# Altium PCB Toshiba_CB_PCB1.PcbDoc
Units mm, origin at the board's own origin, x right, y up, seen from the top; angles counter-clockwise.
Board outline 110 x 115 mm, 2 copper layers (Top Layer, Bottom Layer); 65 components, 53 nets, 193 pads, 41 vias.
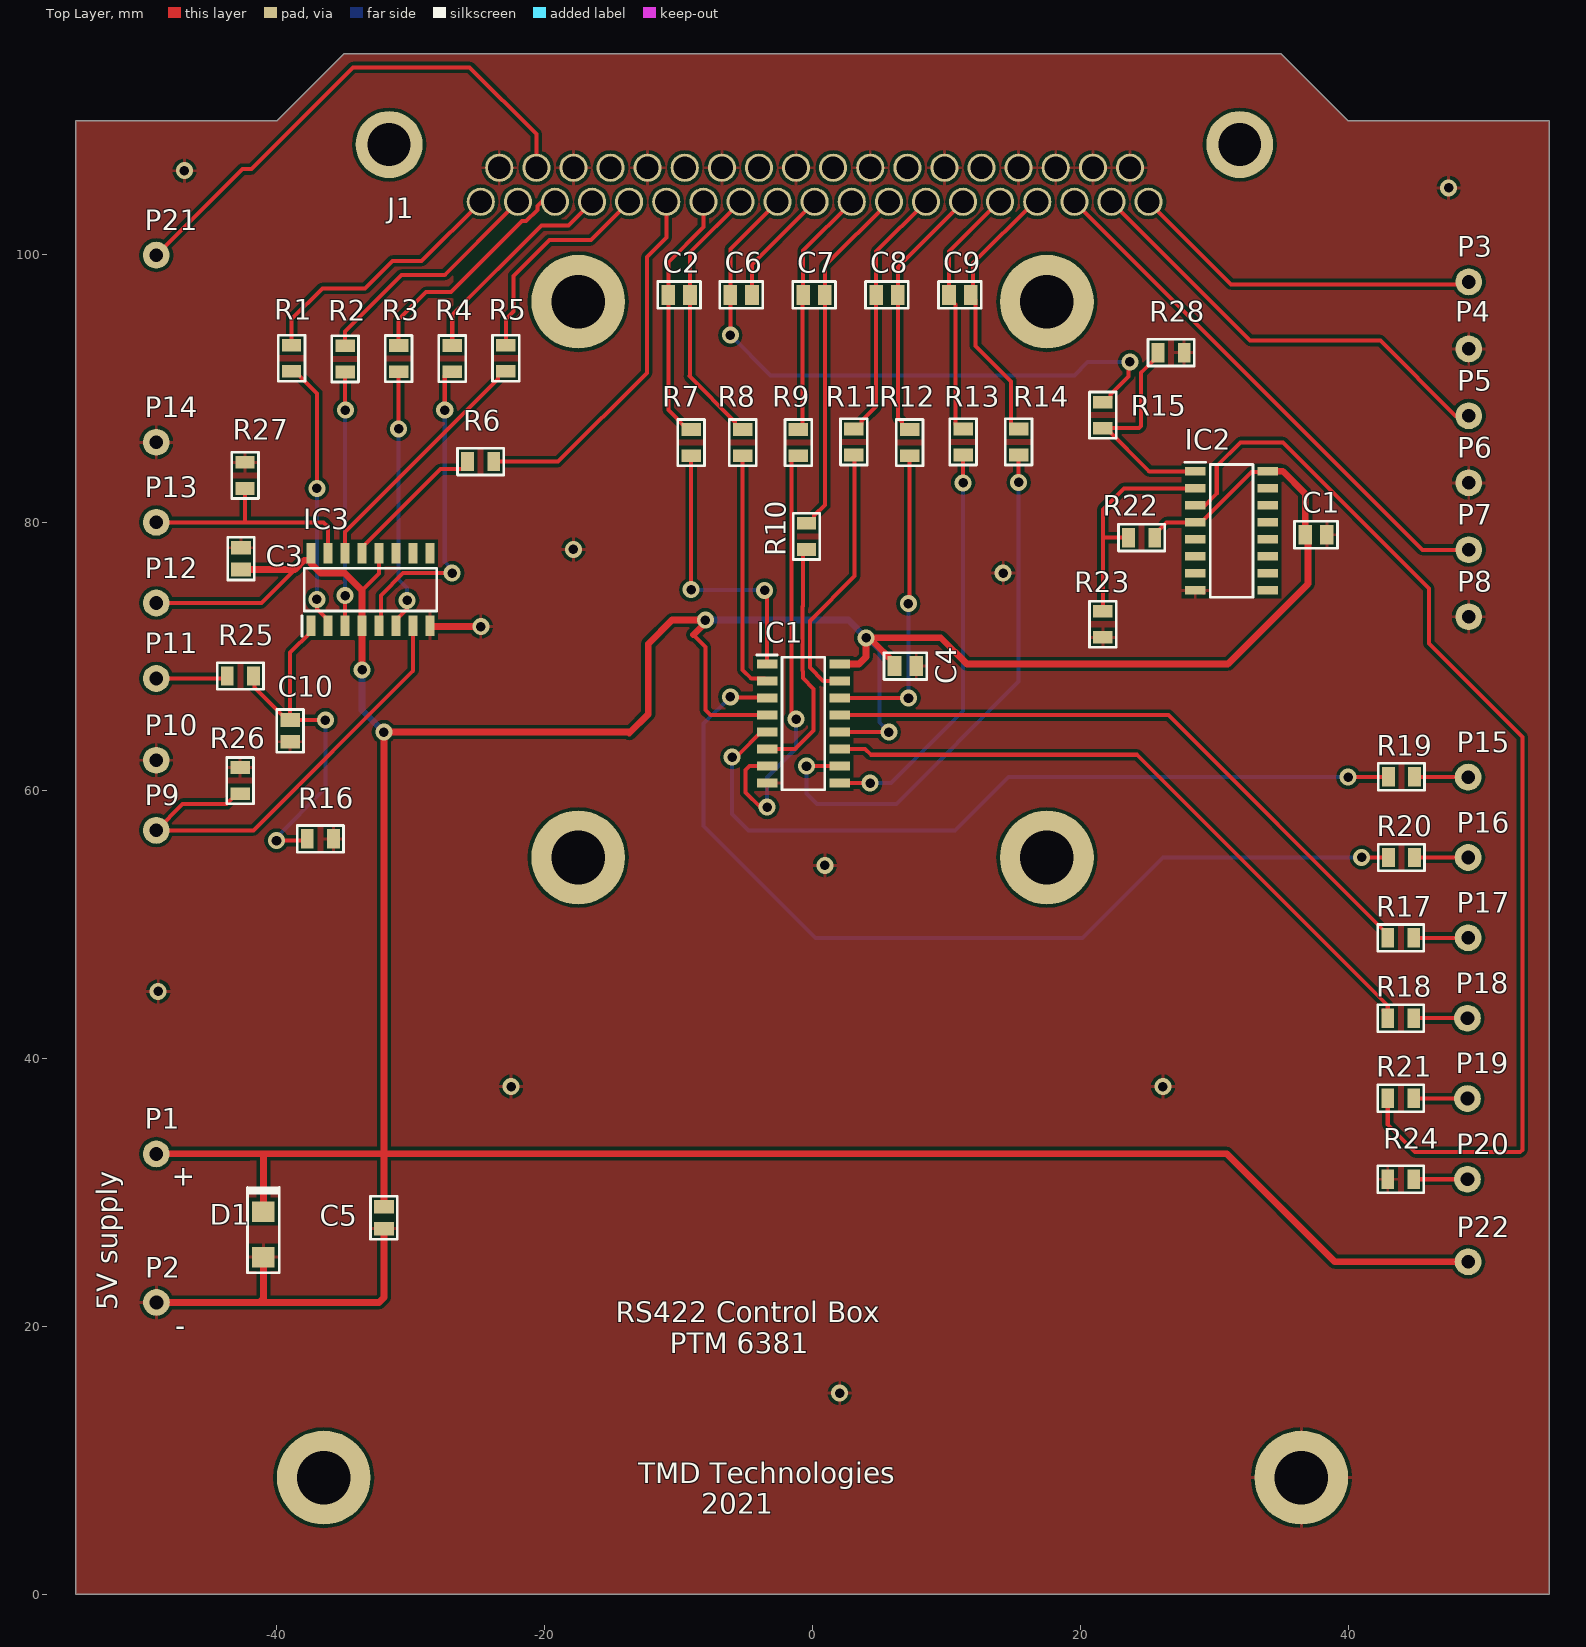
[diagram p0: Top Layer view]
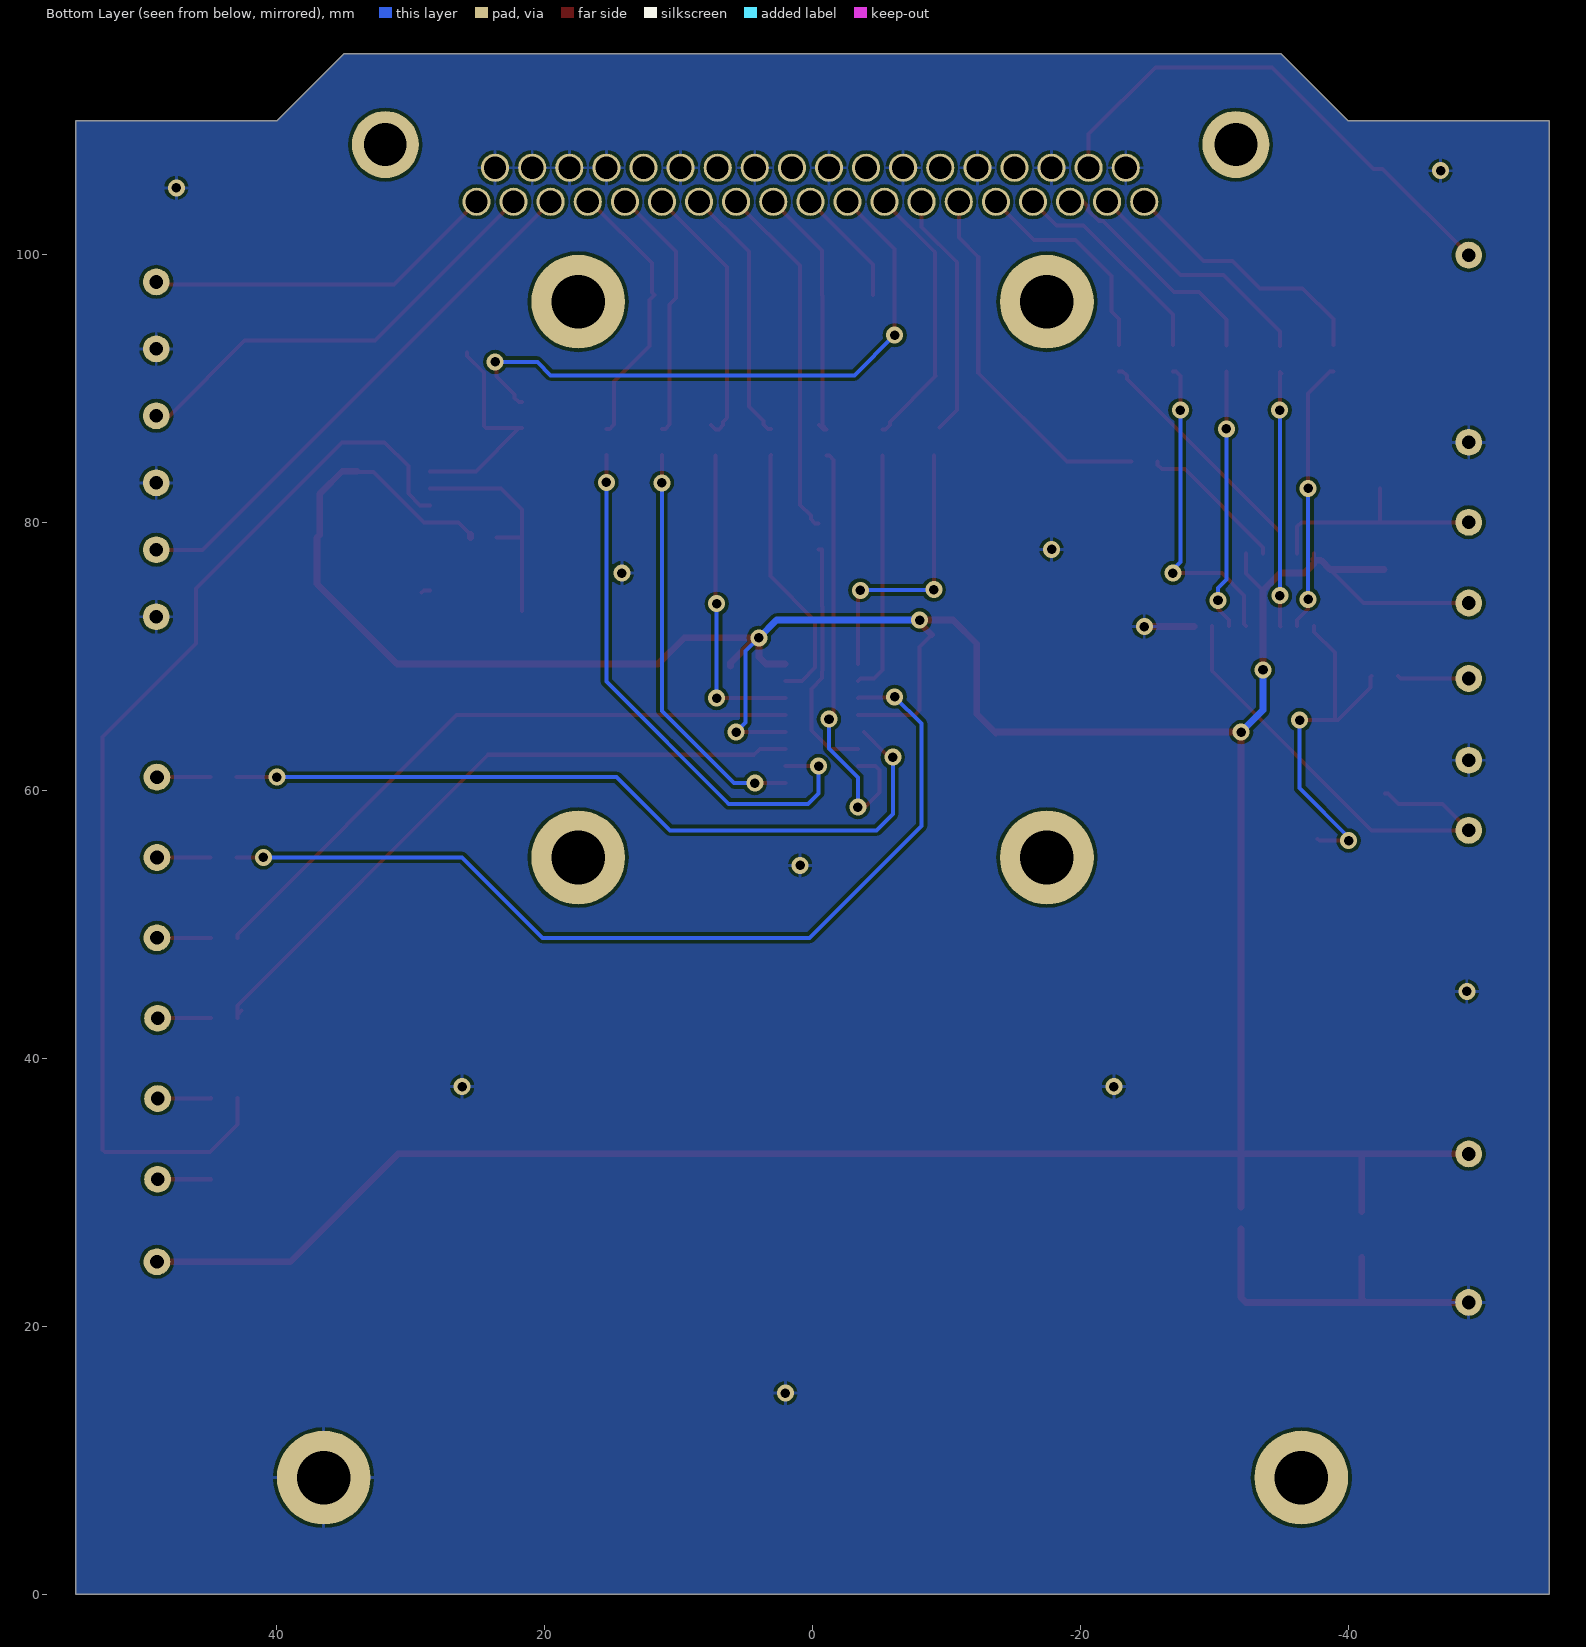
[diagram p1: Bottom Layer view, seen from below]

## Layer stack, top to bottom
Top Solder: solder mask 0.0102, Solder Resist, Dk 3.5
Top Layer: signal copper 0.0356
Dielectric 1: dielectric 0.32, FR-4, Dk 4.8
Bottom Layer: signal copper 0.0356
Bottom Solder: solder mask 0.0102, Solder Resist, Dk 3.5

## Board outline
-35,115 -40,110 -55,110 -55,0 55,0 55,110 40,110 35,115

## Design rules (kind name [scope] priority, off if disabled: settings)
Clearance [All] p1: gap=0.254 ignorepadtopadclearanceinfootprint=FALSE except(0: Arc-Hole Track-Hole SMDPad-Hole THPad-Hole Via-Hole Fill-Hole Poly-Hole Region-Hole Text-Hole)
PolygonConnect [All] p1: connectstyle=Relief reliefconductorwidth=0.254 reliefentries=4 polygonreliefangle="90 Angle" airgapwidth=0.254
RoutingVias [All] p1: holewidth=0.711 width=1.27 viastyle="Through Hole" minholewidth=0.711 minwidth=1.27 maxholewidth=0.711 maxwidth=1.27
SilkToSolderMaskClearance [IsPad] p1: minsilkscreentomaskgap=0.2 clearancetoexposedcopper=TRUE
SolderMaskExpansion [All] p1: expansion=0.102
Width [All] p1: maxlimit=0.5 minlimit=0.254 preferedwidth=0.3
29 further rules are at their usual default settings.

## Components (designator, comment, footprint, x,y, rotation, side; value= is the part's Value field where it differs from the comment)
C1 "Cap1" CAPC2012X94N 37.592,79.096 r0 top value=100nF
C2 "Cap1" CAPC2012X94N -9.96,97 r180 top value=2.2nF
C3 "Cap1" CAPC2012X94N -42.672,77.318 r90 top value=100nF
C4 "Cap1" CAPC2012X94N 6.934,69.291 r0 top value=100nF
C5 "Cap1" CAPC2012X94N -32,28.1 r90 top value=220nF
C6 "Cap1" CAPC2012X94N -5.327,97 r180 top value=2.2nF
C7 "Cap1" CAPC2012X94N 0.115,97 r180 top value=2.2nF
C8 "Cap1" CAPC2012X94N 5.557,97 r180 top value=2.2nF
C9 "Cap1" CAPC2012X94N 11,97 r180 top value=2.2nF
C10 "Cap1" CAPC2012X94N -39,64.452 r90 top value=100nF
D1 "D Zener" Diode -41,28.561 r90 top
IC1 "DS34C86TM_NOPB" SOIC127P600X175-16N -0.68,65 r0 top
IC2 "DS34C86TM_NOPB" SOIC127P600X175-16N 31.288,79.39 r0 top
IC3 "DS34C87TM_NOPB" SOIC127P600X175-16N -33,75 r90 top
J1 "D connector 37 way" "D connector 37 way" 0.145,106.095 r270 top locked
P1 "Pin1" pin1 -49,32.89 r0 top
P2 "Pin1" pin1 -48.987,21.8 r0 top
P3 "Pin1" pin1 49,98 r0 top
P4 "Pin1" pin1 49,93 r0 top
P5 "Pin1" pin1 49,88 r0 top
P6 "Pin1" pin1 49,83 r0 top
P7 "Pin1" pin1 49,78 r0 top
P8 "Pin1" pin1 49,73 r0 top
P9 "Pin1" pin1 -49,57 r180 top
P10 "Pin1" pin1 -49,62.288 r0 top
P11 "Pin1" pin1 -49,68.34 r180 top
P12 "Pin1" pin1 -49,74.025 r0 top
P13 "Pin1" pin1 -49,80 r180 top
P14 "Pin1" pin1 -49,86.025 r0 top
P15 "Pin1" pin1 48.95,61.025 r0 top
P16 "Pin1" pin1 48.95,55.025 r0 top
P17 "Pin1" pin1 48.95,49.025 r0 top
P18 "Pin1" pin1 48.9,43.025 r0 top
P19 "Pin1" pin1 48.9,37.025 r0 top
P20 "Pin1" pin1 48.9,31 r0 top
P21 "Pin1" pin1 -49,100 r0 top
P22 "Pin1" pin1 48.95,24.835 r0 top
R1 "Res1" "Res1 0805" -38.9,93.25 r270 top value=47R
R2 "Res1" "Res1 0805" -34.9,93.2 r270 top value=47R
R3 "Res1" "Res1 0805" -30.9,93.225 r270 top value=47R
R4 "Res1" "Res1 0805" -26.9,93.225 r270 top value=47R
R5 "Res1" "Res1 0805" -22.9,93.25 r270 top value=47R
R6 "Res1" "Res1 0805" -23.81,84.565 r180 top value=47R
R7 "Res1" "Res1 0805" -9.06,86.95 r270 top value=1k8
R8 "Res1" "Res1 0805" -5.21,86.95 r270 top value=1k8
R9 "Res1" "Res1 0805" -1.06,86.95 r270 top value=1k8
R10 "Res1" "Res1 0805" -0.45,79.95 r270 top value=1k8
R11 "Res1" "Res1 0805" 3.09,87 r270 top value=1k8
R12 "Res1" "Res1 0805" 7.25,86.95 r270 top value=1k8
R13 "Res1" "Res1 0805" 11.24,87 r270 top value=1k8
R14 "Res1" "Res1 0805" 15.39,87 r270 top value=1k8
R15 "Res1" "Res1 0805" 21.678,89 r270 top value=1k8
R16 "Res1" "Res1 0805" -35.766,56.393 r180 top value=20k
R17 "Res1" "Res1 0805" 42.95,49 r0 top value=1k8
R18 "Res1" "Res1 0805" 42.95,43 r0 top value=1k8
R19 "Res1" "Res1 0805" 43,61.025 r0 top value=1k8
R20 "Res1" "Res1 0805" 43,55 r0 top value=1k8
R21 "Res1" "Res1 0805" 42.95,37.025 r0 top value=1k8
R22 "Res1" "Res1 0805" 23.593,78.88 r0 top value=1k8
R23 "Res1" "Res1 0805" 21.678,73.39 r270 top value=1k8
R24 "Res1" "Res1 0805" 44.9,30.975 r180 top value=1k8
R25 "Res1" "Res1 0805" -41.748,68.552 r180 top value=1k8
R26 "Res1" "Res1 0805" -42.735,59.765 r90 top value=1k8
R27 "Res1" "Res1 0805" -42.373,82.554 r90 top value=1k8
R28 "Res1" "Res1 0805" 27.75,92.7 r180 top value=20k

## Footprints (in the part's own frame and the unit in brackets; to place one, negate y for a bottom-side part, rotate by r counter-clockwise, add the part's x,y. Pads: shape width x height; smd on the part's side, far side on the other; paste and mask are expansions set on the pad)
CAPC2012X94N [mm]
  rect 1.02x1.47 smd: 1(-0.81,0) 2(0.81,0)
  silkscreen extent -1.6,-1 1.6,1, body extent -1,-0.63 1,0.63, height 0.94
"D connector 37 way" [mm]
  round 2.1 hole 1.65: 1(2.135,-24.915) 2(2.135,-22.145) 3(2.135,-19.375) 4(2.135,-16.605) 5(2.135,-13.835) 6(2.135,-11.065) 7(2.135,-8.295) 8(2.135,-5.525) 9(2.135,-2.755) 10(2.135,0.015) 11(2.135,2.785) 12(2.135,5.555) 13(2.135,8.325) 14(2.135,11.095) 15(2.135,13.865) 16(2.135,16.635) 17(2.135,19.405) 18(2.135,22.175) 19(2.135,24.945) 20(-0.405,-23.535) 21(-0.405,-20.765) 22(-0.405,-17.995) 23(-0.405,-15.225) 24(-0.405,-12.455) 25(-0.405,-9.685) 26(-0.405,-6.915) 27(-0.405,-4.145) 28(-0.405,-1.375) 29(-0.405,1.395) 30(-0.405,4.165) 31(-0.405,6.935) 32(-0.405,9.705) 33(-0.405,12.475) 34(-0.405,15.245) 35(-0.405,18.015) 36(-0.405,20.785) 37(-0.405,23.555)
  round 5 hole 3.2: 38(-2.135,-31.755) 39(-2.135,31.755)
  body extent -14.13,-34.84 3.87,34.73, height 13
Diode [mm] "DO214AC"
  rect 1.52x1.68 smd: 1(-3.4,0) 2(0,0)
  silkscreen extent -4.57,-1.19 1.88,1.19, body extent -3.95,-1.4 0.55,1.4, height 13
pin1 [mm] "Pressed pin"
  round 2 hole 1.02: 1(0,-0.025)
"Res1 0805" [mm]
  rect 0.95x1.45 smd: 1(0,0) 2(1.95,0)
  silkscreen extent -0.75,-1 2.7,1, body extent -1.12,-1.53 1.95,0.63, height 13
SOIC127P600X175-16N [mm]
  rect 1.525x0.65 smd: 1(-2.712,4.445) 2(-2.712,3.175) 3(-2.712,1.905) 4(-2.712,0.635) 5(-2.712,-0.635) 6(-2.712,-1.905) 7(-2.712,-3.175) 8(-2.712,-4.445) 9(2.712,-4.445) 10(2.712,-3.175) 11(2.712,-1.905) 12(2.712,-0.635) 13(2.712,0.635) 14(2.712,1.905) 15(2.712,3.175) 16(2.712,4.445)
  silkscreen extent -3.47,-4.95 1.6,5.12, body extent -3,-4.95 3,4.95, height 1.75

## Part data
C1 C2 C3 C4 C5 C6 C7 C8 C9 C10: "Capacitor", Manufacturer_Name=AVX, Manufacturer_Part_Number=08055C104KAT2A, RS Part Number=4646688P, Allied_Number=70002096, Datasheet Link=http://uk.rs-online.com/web/p/products/4646688P, Height=0.94mm, RS Price/Stock=http://uk.rs-online.com/web/p/products/4646688P
D1: "Zener Diode", LatestRevisionDate=17-Jul-2002, LatestRevisionNote="Re-released for DXP Platform.", PackageReference=DIODE-0.7, Published=8-Jun-2000, Publisher="Altium Limited"
IC1 IC2: "Integrated Circuit", Manufacturer_Name="Texas Instruments", Manufacturer_Part_Number=DS34C86TM/NOPB, RS Part Number=0460607P, Datasheet Link=http://uk.rs-online.com/web/p/products/0460607P, Height=1.75mm, RS Price/Stock=http://uk.rs-online.com/web/p/products/0460607P
IC3: "Integrated Circuit", Manufacturer_Name="Texas Instruments", Manufacturer_Part_Number=DS34C87TM/NOPB, RS Part Number=0460651, Datasheet Link=http://uk.rs-online.com/web/p/products/0460651, Height=1.75mm, RS Price/Stock=http://uk.rs-online.com/web/p/products/0460651
J1: "Receptacle Assembly, 37 Position, Right Angle", PackageDocument=U, DatasheetDocument=19-Mar-1999, Gender=Receptacle, LatestRevisionDate=17-Jul-2002, LatestRevisionNote="Re-released for DXP Platform.", Orientation="Right Angle", PackageReference=787202, Positions=25, Published=15-Jun-2001, Publisher="Altium Limited"
R1 R2 R3 R4 R5 R6 R7 R8 R9 R10 R11 R12 R13 R14 R15 R16 R17 R18 R19 R20 R21 R22 R23 R24 R25 R26 R27 R28: "0805 resistor", LatestRevisionDate=29-May-2009, LatestRevisionNote="IPC-7351 Footprint Added.", PackageDescription="Chip Resistor", PackageReference=J1-0603, Published=8-Jun-2000, Publisher="Altium Limited"

## Free pads (board coordinates)
  round 7 hole 4: 8(-36.5,8.7) 8(-17.5,55) 8(-17.5,96.5) 8(17.5,55) 8(17.5,96.5) 8(36.5,8.7)

## Via types
v1: diameter 1.27, hole 0.711, Top Layer to Bottom Layer, 41 vias

## Nets (pads, with @x,y where several pads share a name; then routed paths per layer and width w, separated by ;. In a path a pad name is that pad's centre, name@x,y a point inside that pad or via, vN(x,y) a via of type N, cw(c..) or ccw(c..) an arc to the next point about the centre after c; other vN are vias at no path point)
5V: C1.1 C3.1 C4.1 C5.2 D1.2 IC1.4 IC1.12 IC1.16 IC2.4 IC2.16 IC3.4 IC3.12 IC3.16 P1.1 P12.1 P22.1 R22.2 | length 308.8
  Top Layer w0.3: P12.1 -41.157,74 -38.649,76.508 ; -37.445,76.945 -37.445,77.275 IC3.16 ; -33.635,74.93 -32.365,76.2 IC3.12 ; -8.897,71.629 -8,70.732 -8,66 -7.635,65.635 IC1.4 ; IC1.12 v1(5.7,64.365) ; R22.2@25.543,79.13 26.438,80.025 IC2.4 29.013,80.025 32.788,83.799 33.964,83.799 IC2.16
  Top Layer w0.5: P1.1 -48.987,32.878 -42.012,32.878 -42,32.89 -41,32.89 ; C3.1 -38.649,76.508 -37.958,77.2 -37.52,77.2 IC3.16@-37.445,77.275 ; D1.2 -41,32.89 ; -37.445,76.945 -36.734,76.234 -34.94,76.234 -33.635,74.93 IC3.4 v1(-33.635,69) ; C5.2 -32,32.89 ; -8.897,71.629 -8,72.527 v1(-8,72.725) -10.494,72.725 -12.259,70.961 -12.259,65.704 -13.69,64.273 -13.69,64.365 v1(-32,64.365) -32,32.89 ; IC1.16 3.473,69.445 4,69.972 v1(4,71.405) ; C4.1 6.124,69.516 4.383,71.257 4.147,71.257 v1(4,71.405) ; R22.2 R22.2@25.543,79.13 ; IC2.16 35.115,83.835 36.782,82.168 C1.1 36.999,78.879 36.999,75.431 31.013,69.445 11.53,69.445 9.57,71.405 v1(4,71.405) ; P22.1 39,24.81 30.92,32.89 -32,32.89 ; -41,32.89 -32,32.89
  Bottom Layer w0.3: v1@4.005,71.4 5,70.405 5,65.065 v1(5.7,64.365)
  Bottom Layer w0.5: v1(-33.635,69) -33.635,66 v1(-32,64.365) ; v1(-8,72.725) 2.679,72.725 v1(4,71.405)
"BEAM MONITOR": J1.18 P5.1 | length 33.3
  Top Layer w0.3: J1.18 32.68,93.6 42.4,93.6 48.025,87.975 P5.1
"CATHODE V MON": J1.17 P7.1 | length 40.2
  Top Layer w0.3: J1.17 45.535,77.975 P7.1
"FAULT A IN": IC1.9 R13.2 | length 30.6
  Top Layer w0.3: IC1.9 v1(4.31,60.555) ; v1(11.24,82.975) R13.2
  Bottom Layer w0.3: v1(4.31,60.555) 5.865,60.555 11.24,65.93 v1(11.24,82.975)
"FAULT B IN": IC1.10 R14.2 | length 41.4
  Top Layer w0.3: v1(-0.45,61.825) IC1.10 ; v1(15.39,83) R14.2
  Bottom Layer w0.3: v1(-0.45,61.825) -0.45,59.77 0.32,59 6.255,59 15.39,68.135 v1(15.39,83)
GND: C1.2 C3.2 C4.2 C5.1 C10.1 D1.1 IC1.8 IC2.8 IC3.8 J1.20 J1.22 J1.24 J1.26 J1.28 J1.30 J1.32 J1.34 J1.35 J1.36 J1.37 P2.1 P4.1 P6.1 P8.1 P10.1 P14.1 pad.8@36.5,8.7 R16.1 R23.2 R24.2 R26.2 R27.2 R28.1 | length 30.8
  Top Layer w0.3: IC3.8 IC3.8@-28.508,72.241 ; v1@-24.865,72.241 -24.817,72.288 v1(-24.77,72.241) v1@-24.77,71.978 ; IC2.8 29.013,74.945 IC2.8@29.188,74.77
  Top Layer w0.5: P2.1@-48.852,21.91 P2.1 -41.293,21.775 ; D1.1 -41,22.068 -41.293,21.775 ; C5.1 -32,22.14 -32.365,21.775 -41.293,21.775 ; IC3.8@-28.508,72.241 v1@-24.865,72.241
  other v1: 2.032,15 -22.5,37.894 26.163,37.894 -48.852,45 0.92,54.411 14.24,76.234 -17.85,78 47.5,105 -46.896,106.277
"GRID WINDOW A OUT": IC3.6 R3.2 | length 19.6
  Top Layer w0.3: IC3.6 -31.095,72.725 -30.275,73.546 v1(-30.275,74.204) ; v1(-30.9,87) R3.2
  Bottom Layer w0.3: v1(-30.9,87) -30.9,75.751 -30.275,75.126 v1(-30.275,74.204)
"GRID WINDOW B OUT": IC3.5 R4.2 | length 24
  Top Layer w0.3: IC3.5 -32.232,72.421 -32.232,74.561 -30.559,76.234 v1(-26.91,76.234) ; v1(-27.46,88.4) -27.46,90.95 -27.135,91.275 R4.2
  Bottom Layer w0.3: v1(-27.46,88.4) -27.46,77.047 -26.91,76.497 v1(-26.91,76.234)
"HELIX MONITOR": J1.19 P3.1 | length 26.5
  Top Layer w0.3: J1.19 31.25,97.8 48.825,97.8 P3.1
NetC2_1: C2.1 J1.8 R8.1 | length 20.4
  Top Layer w0.3: J1.8 -9.15,100.19 C2.1 -9.15,90.99 -9.2,90.94 -5.785,87.525 -5.785,87.275 -5.46,86.95 R8.1
NetC2_2: C2.2 J1.7 R7.1 | length 18.5
  Top Layer w0.3: R7.1@-9.472,87.113 -10.77,88.41 C2.2 -10.77,99.444 -8.15,102.064 J1.7
NetC6_2: C6.2 J1.9 R15.1 | length 46.9
  Top Layer w0.3: v1(-6.137,94) C6.2 -6.137,100.432 J1.9 ; R15.1 21.928,89 22.253,89.325 22.253,89.575 23.593,90.915 23.593,91.893 v1(23.7,92)
  Bottom Layer w0.3: v1(-6.137,94) -3.137,91 19.55,91 20.55,92 v1(23.7,92)
NetC7_1: C7.1 J1.12 R10.1 | length 26.7
  Top Layer w0.3: R10.1 -0.2,79.95 0.125,80.275 0.125,80.525 0.925,81.325 C7.1 0.925,99.185 J1.12
NetC7_2: C7.2 J1.11 R9.1 | length 19.4
  Top Layer w0.3: R9.1@-0.485,87.275 -0.81,86.95 R9.1 -0.735,87.275 -0.735,96.96 C7.2 -0.695,100.335 J1.11
NetC8_1: C8.1 J1.14 R12.1 | length 20
  Top Layer w0.3: R12.1@7.575,87.275 R12.1 7,86.95 6.675,87.275 6.675,87.525 6.368,87.833 C8.1 6.368,99.087 J1.14
NetC8_2: C8.2 J1.13 R11.1 | length 19.3
  Top Layer w0.3: R11.1 3.34,87 3.665,87.325 3.665,87.575 4.747,88.657 C8.2 4.747,100.237 J1.13
NetC9_1: C9.1 J1.16 R14.1 | length 20.8
  Top Layer w0.3: R14.1 15.14,87 14.815,87.325 14.815,90.547 12.17,93.193 12.17,96.64 C9.1 12,97.19 12,99.38 16.58,103.96 J1.16
NetC9_2: C9.2 J1.15 R13.1 | length 19.2
  Top Layer w0.3: R13.1 10.99,87 10.665,87.325 10.665,96.3 10.19,96.775 C9.2 10.19,100.254 13.896,103.96 J1.15
NetC10_2: C10.2 IC3.1 R16.2 R25.1 | length 27.7
  Top Layer w0.3: R25.1 -41.662,68.466 -41.662,67.699 -39.225,65.262 C10.2 ; v1(-40.023,56.266) -37.843,56.266 R16.2 ; IC3.1 -37.445,71.85 -39,70.296 C10.2 ; v1(-36.366,65.262) C10.2
  Bottom Layer w0.3: v1@-40.15,56.393 -36.366,60.177 v1(-36.366,65.262)
NetIC1_3: IC1.3 R20.1 | length 70.4
  Top Layer w0.3: v1(-6.137,67) -6.09,66.953 -3.439,66.953 IC1.3 ; v1(41,55) R20.1
  Bottom Layer w0.3: v1(-6.137,67) -8.15,64.988 -8.15,57.363 0.213,49 8.47,49 20.163,49 26.163,55 v1(41,55)
NetIC1_5: IC1.5 R19.1 | length 58.1
  Top Layer w0.3: v1(-6,62.485) v1@-5.814,62.671 ; v1@-5.524,62.671 IC1.5@-3.829,64.365 ; v1(40,61) 42.975,61 R19.1
  Bottom Layer w0.3: v1(-6,62.485) -6,58.23 -4.795,57.025 10.645,57.025 14.62,61 v1(40,61)
NetIC1_11: IC1.11 R18.1 | length 50.3
  Top Layer w0.3: IC1.11 3.93,63.095 4.354,62.671 24.229,62.671 42.95,43.95 R18.1@42.95,43.25 ; R18.1@42.625,43.575 R18.1@42.95,43.25 ; R18.1 R18.1@42.95,43.25
NetIC1_13: IC1.13 R17.1 | length 48
  Top Layer w0.3: IC1.13 26.565,65.635 42.95,49.25 R17.1
NetIC2_2: IC2.2 R22.1 R23.1 | length 17.1
  Top Layer w0.3: R23.1 21.678,79 ; R22.1 21.798,78.88 21.678,79 ; IC2.2 23.243,82.565 21.678,81 21.678,79
NetIC2_3: IC2.3 R21.1 | length 82.9
  Top Layer w0.3: IC2.3 29.295,81.295 30.182,82.182 30.182,84.232 31.95,86 35.115,86 46.02,75.095 46.02,70.98 53,64 53,33.176 52.824,33 45,33 42.95,35.05 R21.1
NetIC3_7: IC3.7 P9.1 R26.1 | length 34.9
  Top Layer w0.3: R26.1 -42.985,59.765 -43.75,59 -47.025,59 P9.1 -41.743,57.025 -29.825,68.943 IC3.7
NetIC3_15: IC3.15 P13.1 R27.1 | length 17.5
  Top Layer w0.3: P13.1 -42.5,80.025 ; R27.1 -42.373,80.152 -42.5,80.025 ; IC3.15 -36.175,79.7 -36.5,80.025 -42.5,80.025
NetJ1_1: J1.1 R1.1 | length 19.7
  Top Layer w0.3: R1.1 -38.9,95.2 -36.6,97.5 -33.4,97.5 -31.354,99.546 -29.184,99.546 J1.1
NetJ1_2: J1.2 R2.1 | length 18.6
  Top Layer w0.3: R2.1 -34.9,94.277 -30.677,98.5 -27.46,98.5 -22.588,103.372 -22.588,103.738 -22.81,103.96 J1.2
NetJ1_3: J1.3 R3.1 | length 17.4
  Top Layer w0.3: R3.1 -30.9,95.175 -28.866,97.209 -26.991,97.209 -21.694,102.506 -21.398,102.506 -20.546,103.358 -20.546,103.654 -20.24,103.96 J1.3
NetJ1_4: J1.4 R4.1 | length 16.2
  Top Layer w0.3: R4.1@-26.9,93.275 -26.9,94.008 -26.9,95.532 -20.232,102.2 -18.22,102.2 J1.4
NetJ1_5: J1.5 R5.1 | length 16.3
  Top Layer w0.3: R5.1 -22.9,95.2 -22.325,95.775 -22.325,98.425 -19.65,101.1 -16.55,101.1 J1.5
NetJ1_6: J1.6 R6.1 | length 27.6
  Top Layer w0.3: R6.1 -19,84.565 -12.375,91.19 -12.375,99.822 -10.92,101.276 J1.6
NetP11_1: P11.1 R25.2 | length 5.4
  Top Layer w0.3: P11.1 -43.885,68.365 R25.2
NetP15_1: P15.1 R19.2 | length 4
  Top Layer w0.3: R19.2 44.975,61 P15.1
NetP16_1: P16.1 R20.2 | length 4
  Top Layer w0.3: R20.2 P16.1
NetP17_1: P17.1 R17.2 | length 4
  Top Layer w0.3: R17.2 P17.1
NetP18_1: P18.1 R18.2 | length 4
  Top Layer w0.3: R18.2 P18.1
NetP19_1: P19.1 R21.2 | length 4
  Top Layer w0.3: R21.2 44.925,37 P19.1
NetP20_1: P20.1 R24.1 | length 4
  Top Layer w0.3: R24.1 P20.1
"OP A IN": IC1.15 R11.2 | length 19.9
  Top Layer w0.3: IC1.15 0.801,68.175 -0.2,69.176 -0.2,72.651 3.149,76 3.149,84.991 R11.2
"OP B IN": IC1.14 R12.2 | length 23.3
  Top Layer w0.3: IC1.14 v1(7.166,66.905) ; v1(7.157,73.955) 7.25,74.047 R12.2
  Bottom Layer w0.3: v1(7.157,73.955) 7.162,73.95 7.162,66.909 v1(7.166,66.905)
"PRE_TRIGGER A OUT": IC3.14 R5.2 | length 18.7
  Top Layer w0.3: IC3.14 -34.905,79.295 -23.475,90.725 -23.475,90.975 -23.15,91.3 R5.2
"PRE_TRIGGER B OUT": IC3.13 R6.2 | length 11.1
  Top Layer w0.3: IC3.13 -33.635,78.15 -27.795,83.99 -26.085,83.99 -25.76,84.315 R6.2
"PRIM POWER A IN": IC2.1 R15.2 R28.2 | length 16.9
  Top Layer w0.3: R15.2 R15.2@21.928,87.05 ; R28.2 25.8,92.45 24.543,91.193 24.543,87.226 24.367,87.05 R15.2@21.928,87.05 ; IC2.1 25.143,83.835 R15.2@21.928,87.05
"PRIM POWER B IN": C6.1 J1.10 | length 8.9
  Top Layer w0.3: C6.1 -4.517,99.282 J1.10
"SBY A IN": IC1.7 R9.2 | length 33.1
  Top Layer w0.3: v1(-3.392,58.766) -3.902,58.766 -5,59.863 -5,61.542 -4.717,61.825 IC1.7 ; v1(-1.23,65.328) -1.579,65.677 -1.579,84.675 -1.254,85 R9.2
  Bottom Layer w0.3: v1(-3.392,58.766) -3.392,60.966 -1.23,63.128 v1(-1.23,65.328)
"SBY B IN": IC1.6 R10.2 | length 18.2
  Top Layer w0.3: IC1.6 -1.307,63.095 0.09,64.492 0.09,67.597 -0.7,68.387 -0.7,68.892 -0.754,68.946 -0.754,73.722 -0.7,73.776 -0.7,78 R10.2
"SBY/OP A OUT": IC3.2 R1.2 | length 20.3
  Top Layer w0.3: R1.2 -38.65,91.3 -37,89.65 v1(-37,82.565) ; v1(-37,74.275) -37,73.55 -36.175,72.725 IC3.2
  Bottom Layer w0.3: v1(-37,74.275) v1(-37,82.565)
"SBY/OP B OUT": IC3.3 R2.2 | length 19.2
  Top Layer w0.3: R2.2@-35,91.15 R2.2 -34.9,88.43 v1(-34.88,88.41) ; IC3.3@-34.953,72.241 IC3.3 -34.903,72.291 -34.903,74.549 v1(-34.9,74.552)
  Bottom Layer w0.3: v1(-34.9,74.552) -34.89,74.561 -34.89,88.4 v1(-34.88,88.41)
TWTHOT_SW: J1.21 P21.1 | length 38.8
  Top Layer w0.3: P21.1 -42.571,106.404 -41.896,106.404 -34.3,114 -25.6,114 -20.62,109.02 J1.21
"WARM UP A IN": IC1.1 R7.2 | length 21.1
  Top Layer w0.3: v1(-9.06,75) R7.2 ; v1(-3.567,74.945) -3.567,74.821 -3.392,74.645 IC1.1
  Bottom Layer w0.3: v1(-9.06,75) -9.032,74.972 -3.594,74.972 v1(-3.567,74.945)
"WARM UP B IN": IC1.2 R8.2 | length 18.2
  Top Layer w0.3: R8.2 -5.21,69 -4.575,68.365 -4.517,68.365 -4.502,68.35 -3.567,68.35 IC1.2
pads on no net: IC2.5 IC2.6 IC2.7 IC2.9 IC2.10 IC2.11 IC2.12 IC2.13 IC2.14 IC2.15 IC3.9 IC3.10 IC3.11 J1.23 J1.25 J1.27 J1.29 J1.31 J1.33 J1.38 J1.39

## Polygon pours and split planes (outlines as drawn)
GND on Top Layer "Top Layer-GND" (solid, pour order 18): -55,0 55,0 55,110 40,110 35,115 -35,115 -40,110 -55,110 -55,0
no net on Top Layer "Top Layer-No Net" (solid, pour order 10): -55,1
GND on Bottom Layer "Bottom Layer-GND" (solid, pour order 16): -55,0 55,0 55,110 40,110 35,115 -35,115 -40,110 -55,110
no net on Bottom Layer "Bottom Layer-No Net" (solid, pour order 14): -55,1

## Other copper
Top Layer:
  pour cut-out: -20.244,103.226 -21.106,102.363 -21.106,102.215 -23.236,102.215 -26.797,98.654 -26.797,96.037 -20.625,102.21 -20.574,102.21 -20.574,102.27 -20.232,102.612 -20.134,102.514 -19.57,102.514 -19.57,102.83 -19.479,102.921 -19.784,103.226

## Silkscreen, mask and mechanical layers (free items; w line width, h text height)
Top Overlay:
  text "+" at -47.837,30.5 h1.52
  text "5V supply" at -51.9,21.2 h1.52 r90
  text "-" at -47.6,19.3 h1.52
  text "RS422 Control Box /       PTM 6381" at -14.7,18 h1.52
  text "TMD Technologies /        2021" at -13,6 h1.52
Mechanical 1:
  the board outline again, w0.025